# EAGLE board hvreg_feedback_2PS_alt1 (EAGLE 7.2.0)
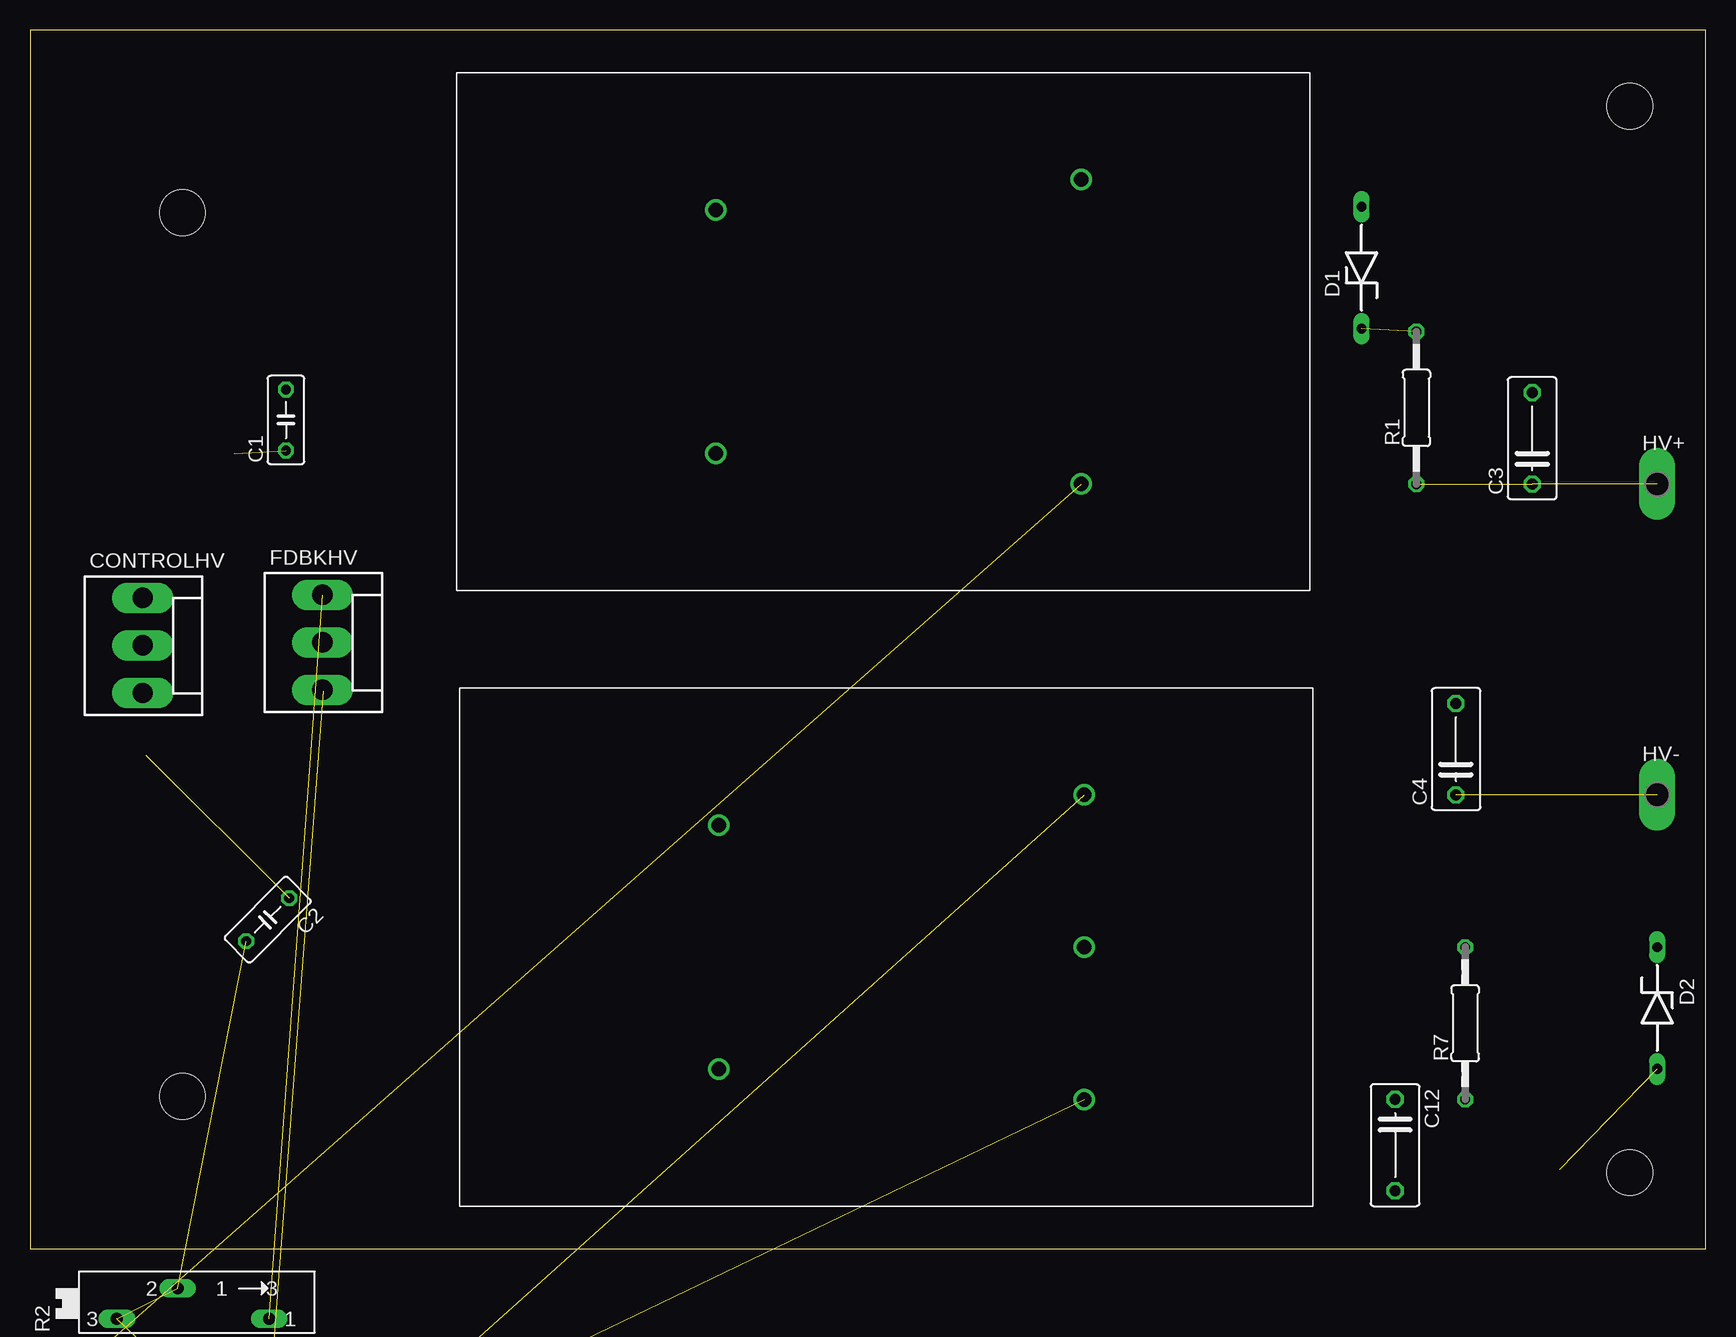
[diagram p0: board, top side]
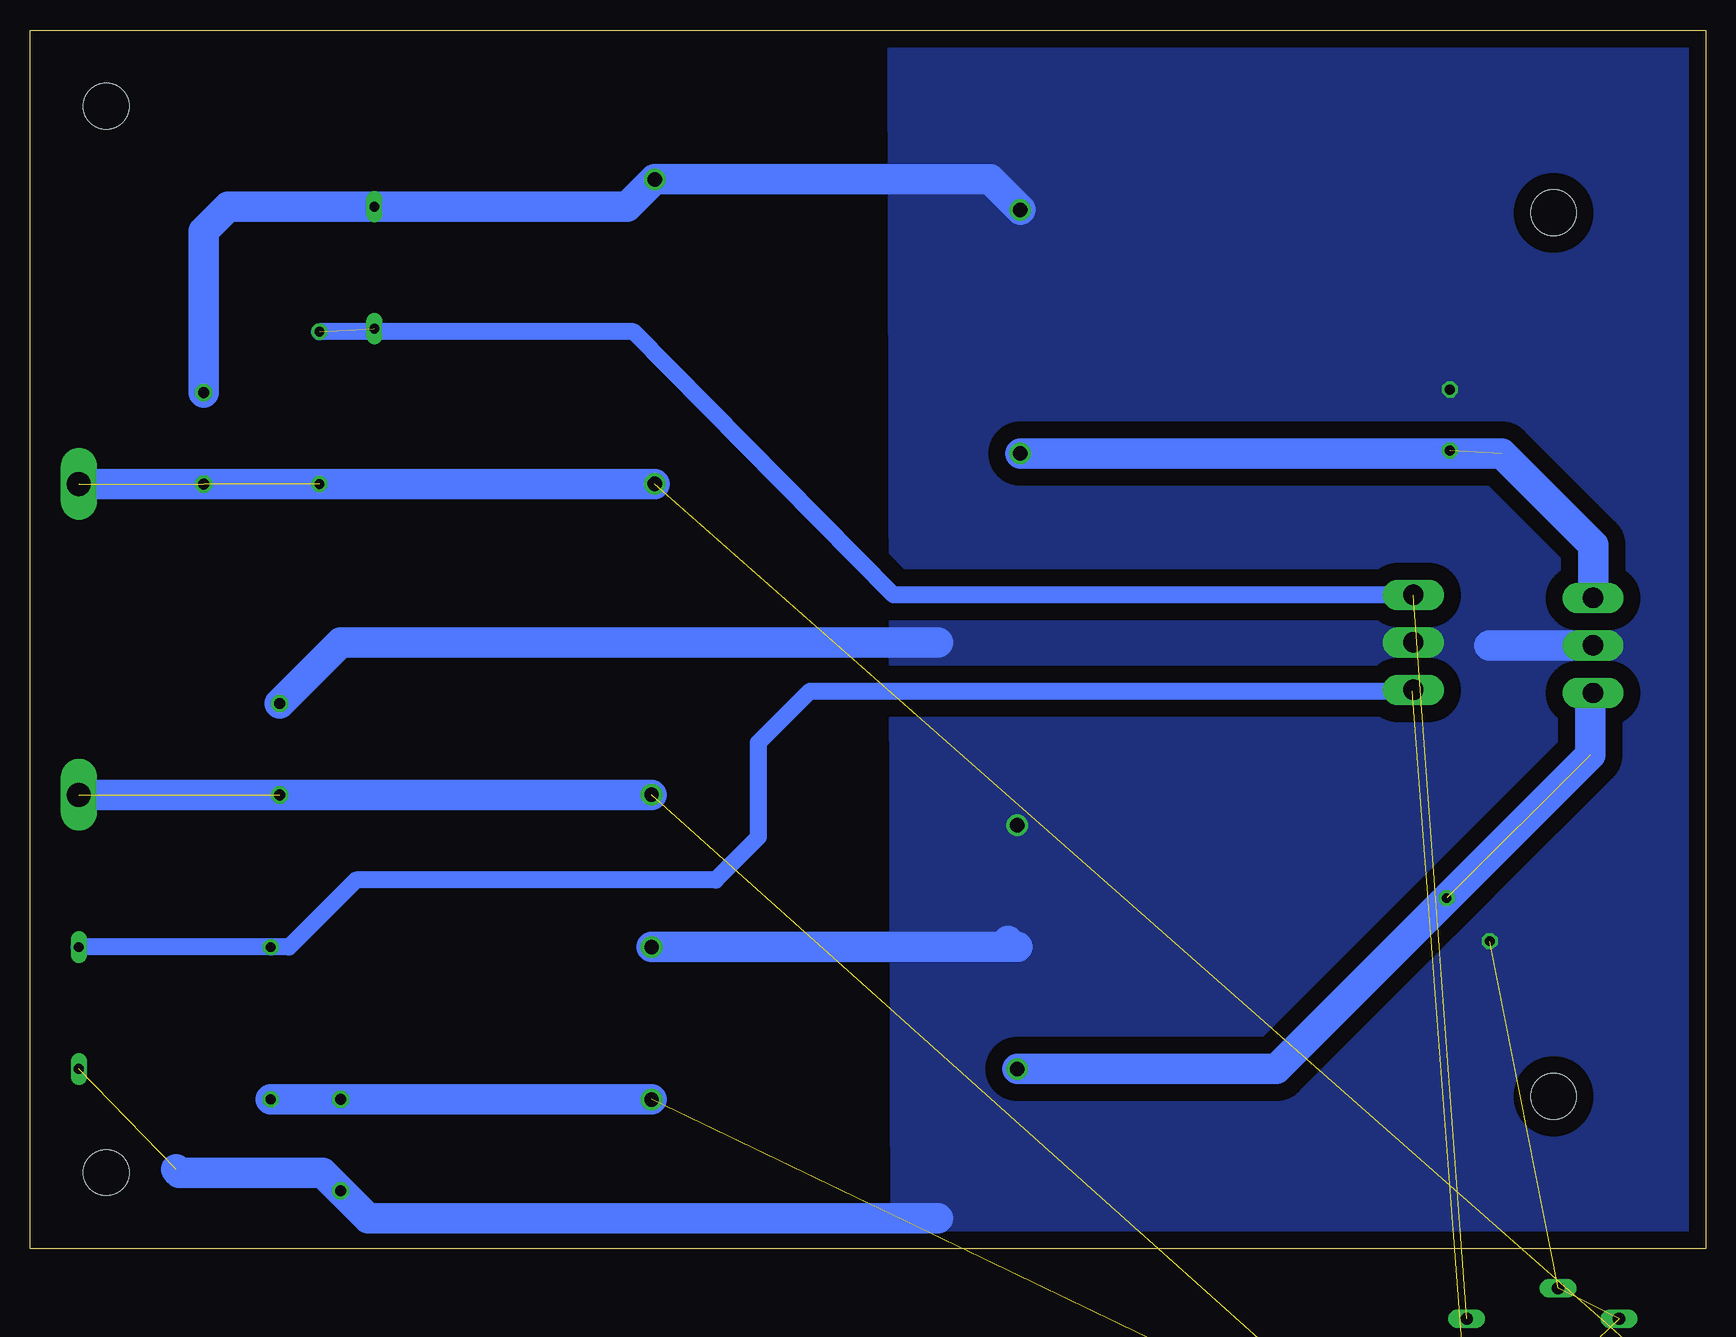
[diagram p1: board, bottom side, seen from below]

Size 139.7 x 101.62 mm. Coordinates in mm from the lower left corner, seen from the top.
Outline: 0,0.02 139.7,0 139.7,101.62 0,101.62 0,0.02
Copper layers (1*16): Top 0.035mm / dielectric 1.5mm / Bottom 0.035mm
Design rules "default": minimum track width 10mil, minimum drill 24mil, track to track 8mil, track to pad 8mil, pad to pad 8mil, via to via 8mil, smd to smd 8mil, copper to edge 40mil, drill to drill 8mil, minimum pad ring 10mil, minimum via ring 8mil, stop-mask expansion 4mil, vias tented up to drill 0mil, thermal gap 10mil
Holes 3.8 mm at 133.35,6.37 133.35,95.27 12.7,12.72 12.7,86.38

## Footprints (pad centres in the part's own frame; a part is rotated, then mirrored left to right if it is on the bottom)
C050-030X075 = drill 0.813 octagon: 1 -2.54,0; 2 2.54,0
C075-042X103 = drill 0.914 octagon: 1 -3.81,0; 2 3.81,0
C225-108X268 = drill 1.016 octagon: 1 -11.303,0; 2 11.303,0
KK-156-3 = drill 1.7 pad 2.184 long: 1 -3.96,0; 2 0,0; 3 3.96,0
ZDIO-10 = drill 0.813 long: A 5.08,0; C -5.08,0
P1-20Y = drill 2.007 pad 2.54 long: TP 0,0
0207/12 = drill 0.813 octagon: 1 -6.35,0; 2 6.35,0
SP19L = drill 1.016 long: A 5.715,-1.27; E -6.985,-1.27; S -1.905,1.27
EMCO-F = drill 1.2: P$1 0,0; P$2 0,20.32; P$3 30.48,-2.54; P$4 30.48,22.86
EMCO-F*CT = drill 1.2: P$1 0,0; P$2 0,20.32; P$3 30.48,-2.54; P$4 30.48,22.86; P$5 30.48,10.16

## Placement (x,y rotation side)
C1  [C050-030X075]  21.34,69.11 90 top
C2  [C050-030X075]  19.81,27.45 225 top
C3  .01u  [C075-042X103]  125.22,67.58 90 top
C4  .01u  [C075-042X103]  118.87,41.68 90 top
C5  1u  [C225-108X268]  5.08,-19.03 0 top  (outside the outline)
C6  1u  [C225-108X268]  5.08,-32.75 0 top  (outside the outline)
C7  1u  [C225-108X268]  5.08,-46.46 0 top  (outside the outline)
C12  .01u  [C075-042X103]  113.79,8.66 270 top
CONTROLHV  [KK-156-3]  9.4,50.31 270 top
D1  1n4733  [ZDIO-10]  111,81.81 90 top
D2  1n4733  [ZDIO-10]  135.64,20.09 270 top
FDBKHV  [KK-156-3]  24.38,50.57 270 top
HV+  TPPAD1-20Y  [P1-20Y]  135.64,63.77 0 top
HV-  TPPAD1-20Y  [P1-20Y]  135.64,37.87 0 top
R1  2M  [0207/12]  115.57,70.12 90 top
R2  [SP19L]  14.22,-4.55 0 top  (outside the outline)
R3  [SP19L]  14.22,-11.92 0 top  (outside the outline)
R7  2M  [0207/12]  119.63,18.82 90 top
U$1  EMCO-F104PIN  [EMCO-F]  57.15,66.31 0 top
U$2  EMCO-F20CT  [EMCO-F*CT]  57.4,15.01 0 top

## Library data of the parts
C1-C7 C12 = rcl
CONTROLHV FDBKHV = con-molex; OC_FARNELL: unknown; OC_NEWARK: unknown
D1 D2 = diode
HV+ HV- = testpad
R1 R7 = resistor
R2 R3 = pot
U$1 U$2 = dc-dc-converter

## Nets
GND: C1.2 C2.2 C3.2 C4.2 C5.2 C6.2 C7.2 C12.2 CONTROLHV.2 D1.A D2.A FDBKHV.2 R2.E R2.S R3.E R3.S U$1.P$2 U$1.P$4 U$2.P$2 U$2.P$5
N$1: C3.1 C5.1 HV+.TP R1.1 U$1.P$3
N$2: C6.1 C12.1 R7.1 U$2.P$3
N$3: D1.C FDBKHV.1 R1.2 R2.A
N$4: C1.1 CONTROLHV.1 U$1.P$1
N$5: C2.1 CONTROLHV.3 U$2.P$1
N$6: C4.1 C7.1 HV-.TP U$2.P$4
N$8: D2.C FDBKHV.3 R3.A R7.2

## Tracks (layer width: path | path; a pad name or v marks a point on that pad's centre or on a via)
GND  (8 unrouted)
  Bottom 2.54: U$1.P$2 59.69,89.17 U$1.P$4 89.92,86.89 D1.A 123.19,86.89 125.22,84.86 C3.2 | CONTROLHV.2 18.03,50.31 | 58.17,25.17 58.17,25.67 | U$2.P$5 57.4,25.17 | C4.2 113.79,50.57 64.01,50.57 | 64.01,2.56 111.51,2.56 C12.2 115.32,6.37 127.25,6.37 127.51,6.62
  pour Bottom (isolate 1.422, no thermals): 0,101.37 68.07,101.62 67.82,0.02 0,0.02
N$1  (3 unrouted)
  Bottom 2.54: U$1.P$3 HV+.TP
N$2  (1 unrouted)
  Bottom 2.54: U$2.P$3 C12.1 R7.1
N$3  (2 unrouted)
  Bottom 1.422: FDBKHV.1 67.71,54.53 89.41,76.47 R1.2
N$4  (1 unrouted)
  Bottom 2.54: CONTROLHV.1 9.4,58.69 17.02,66.31 U$1.P$1
N$5  (1 unrouted)
  Bottom 2.54: CONTROLHV.3 9.65,46.1 9.65,41.17 35.81,15.01 U$2.P$1
N$6  (2 unrouted)
  Bottom 2.54: U$2.P$4 HV-.TP
N$8  (1 unrouted)
  Bottom 1.422: FDBKHV.3 24.49,46.5 74.68,46.5 78.99,42.18 78.99,34.31 82.55,30.75 112.52,30.75 118.11,25.17 R7.2 D2.C